# EAGLE board Sprite Sail 2 Layer (EAGLE 9.0.0)
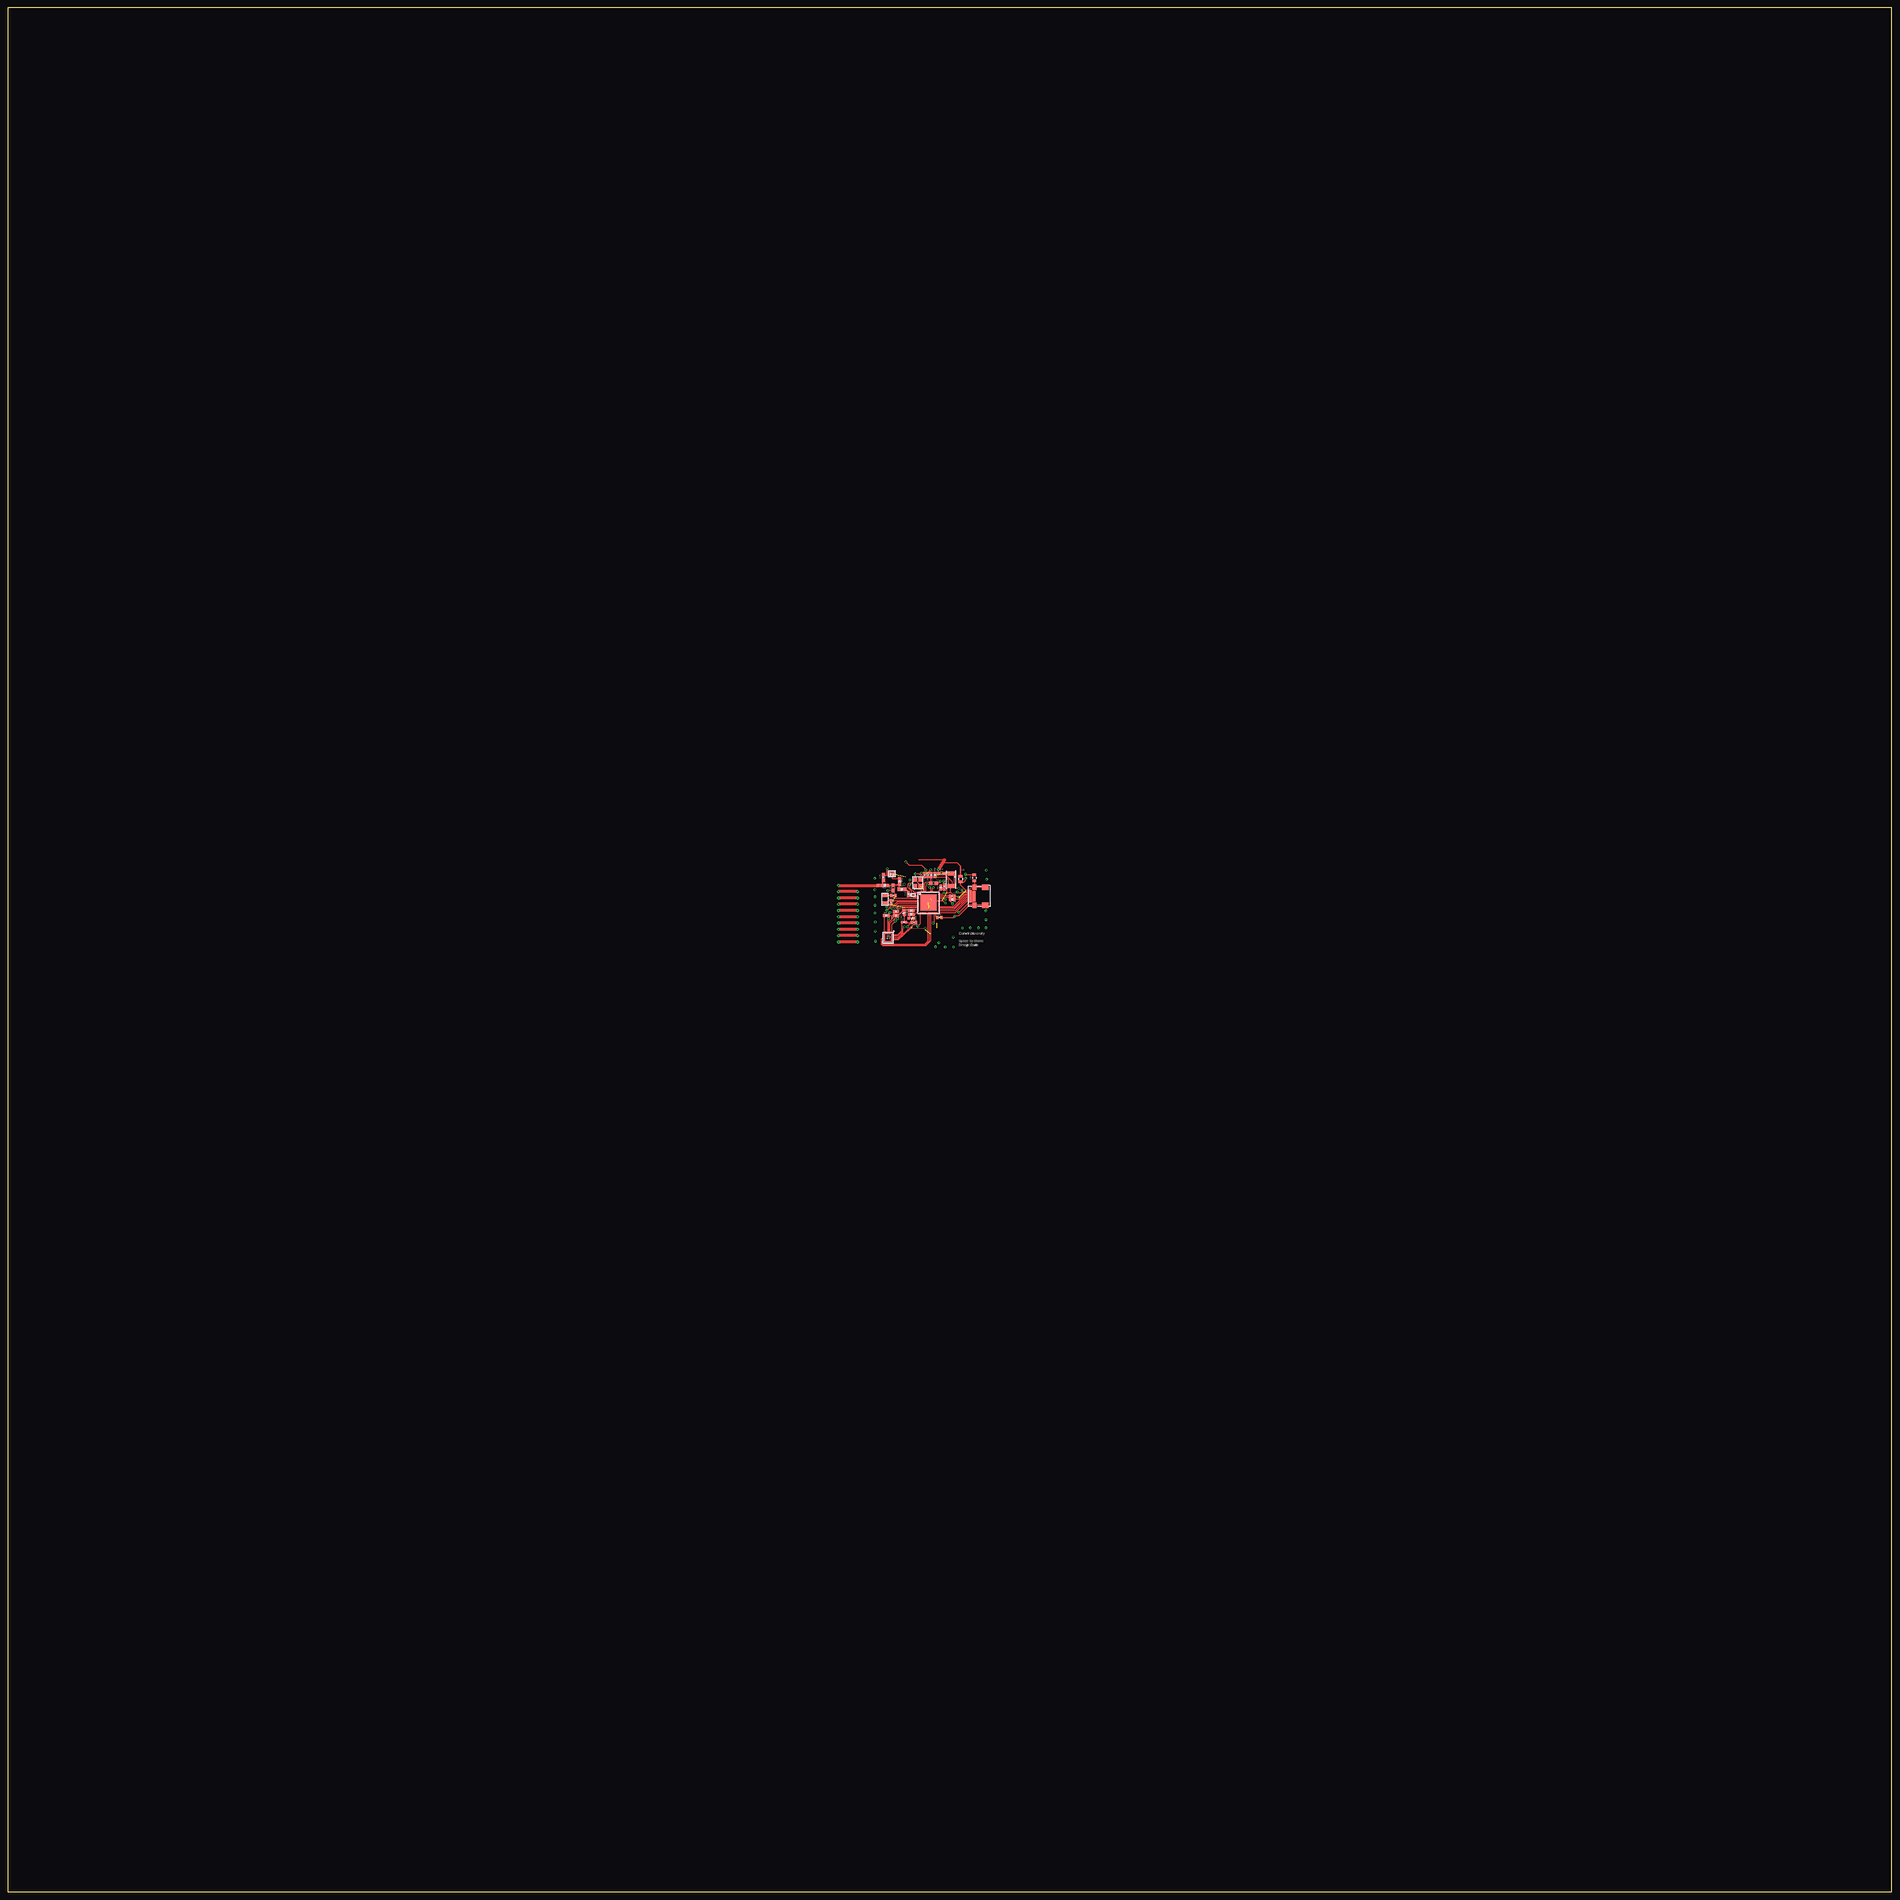
[diagram p0: board, top side]
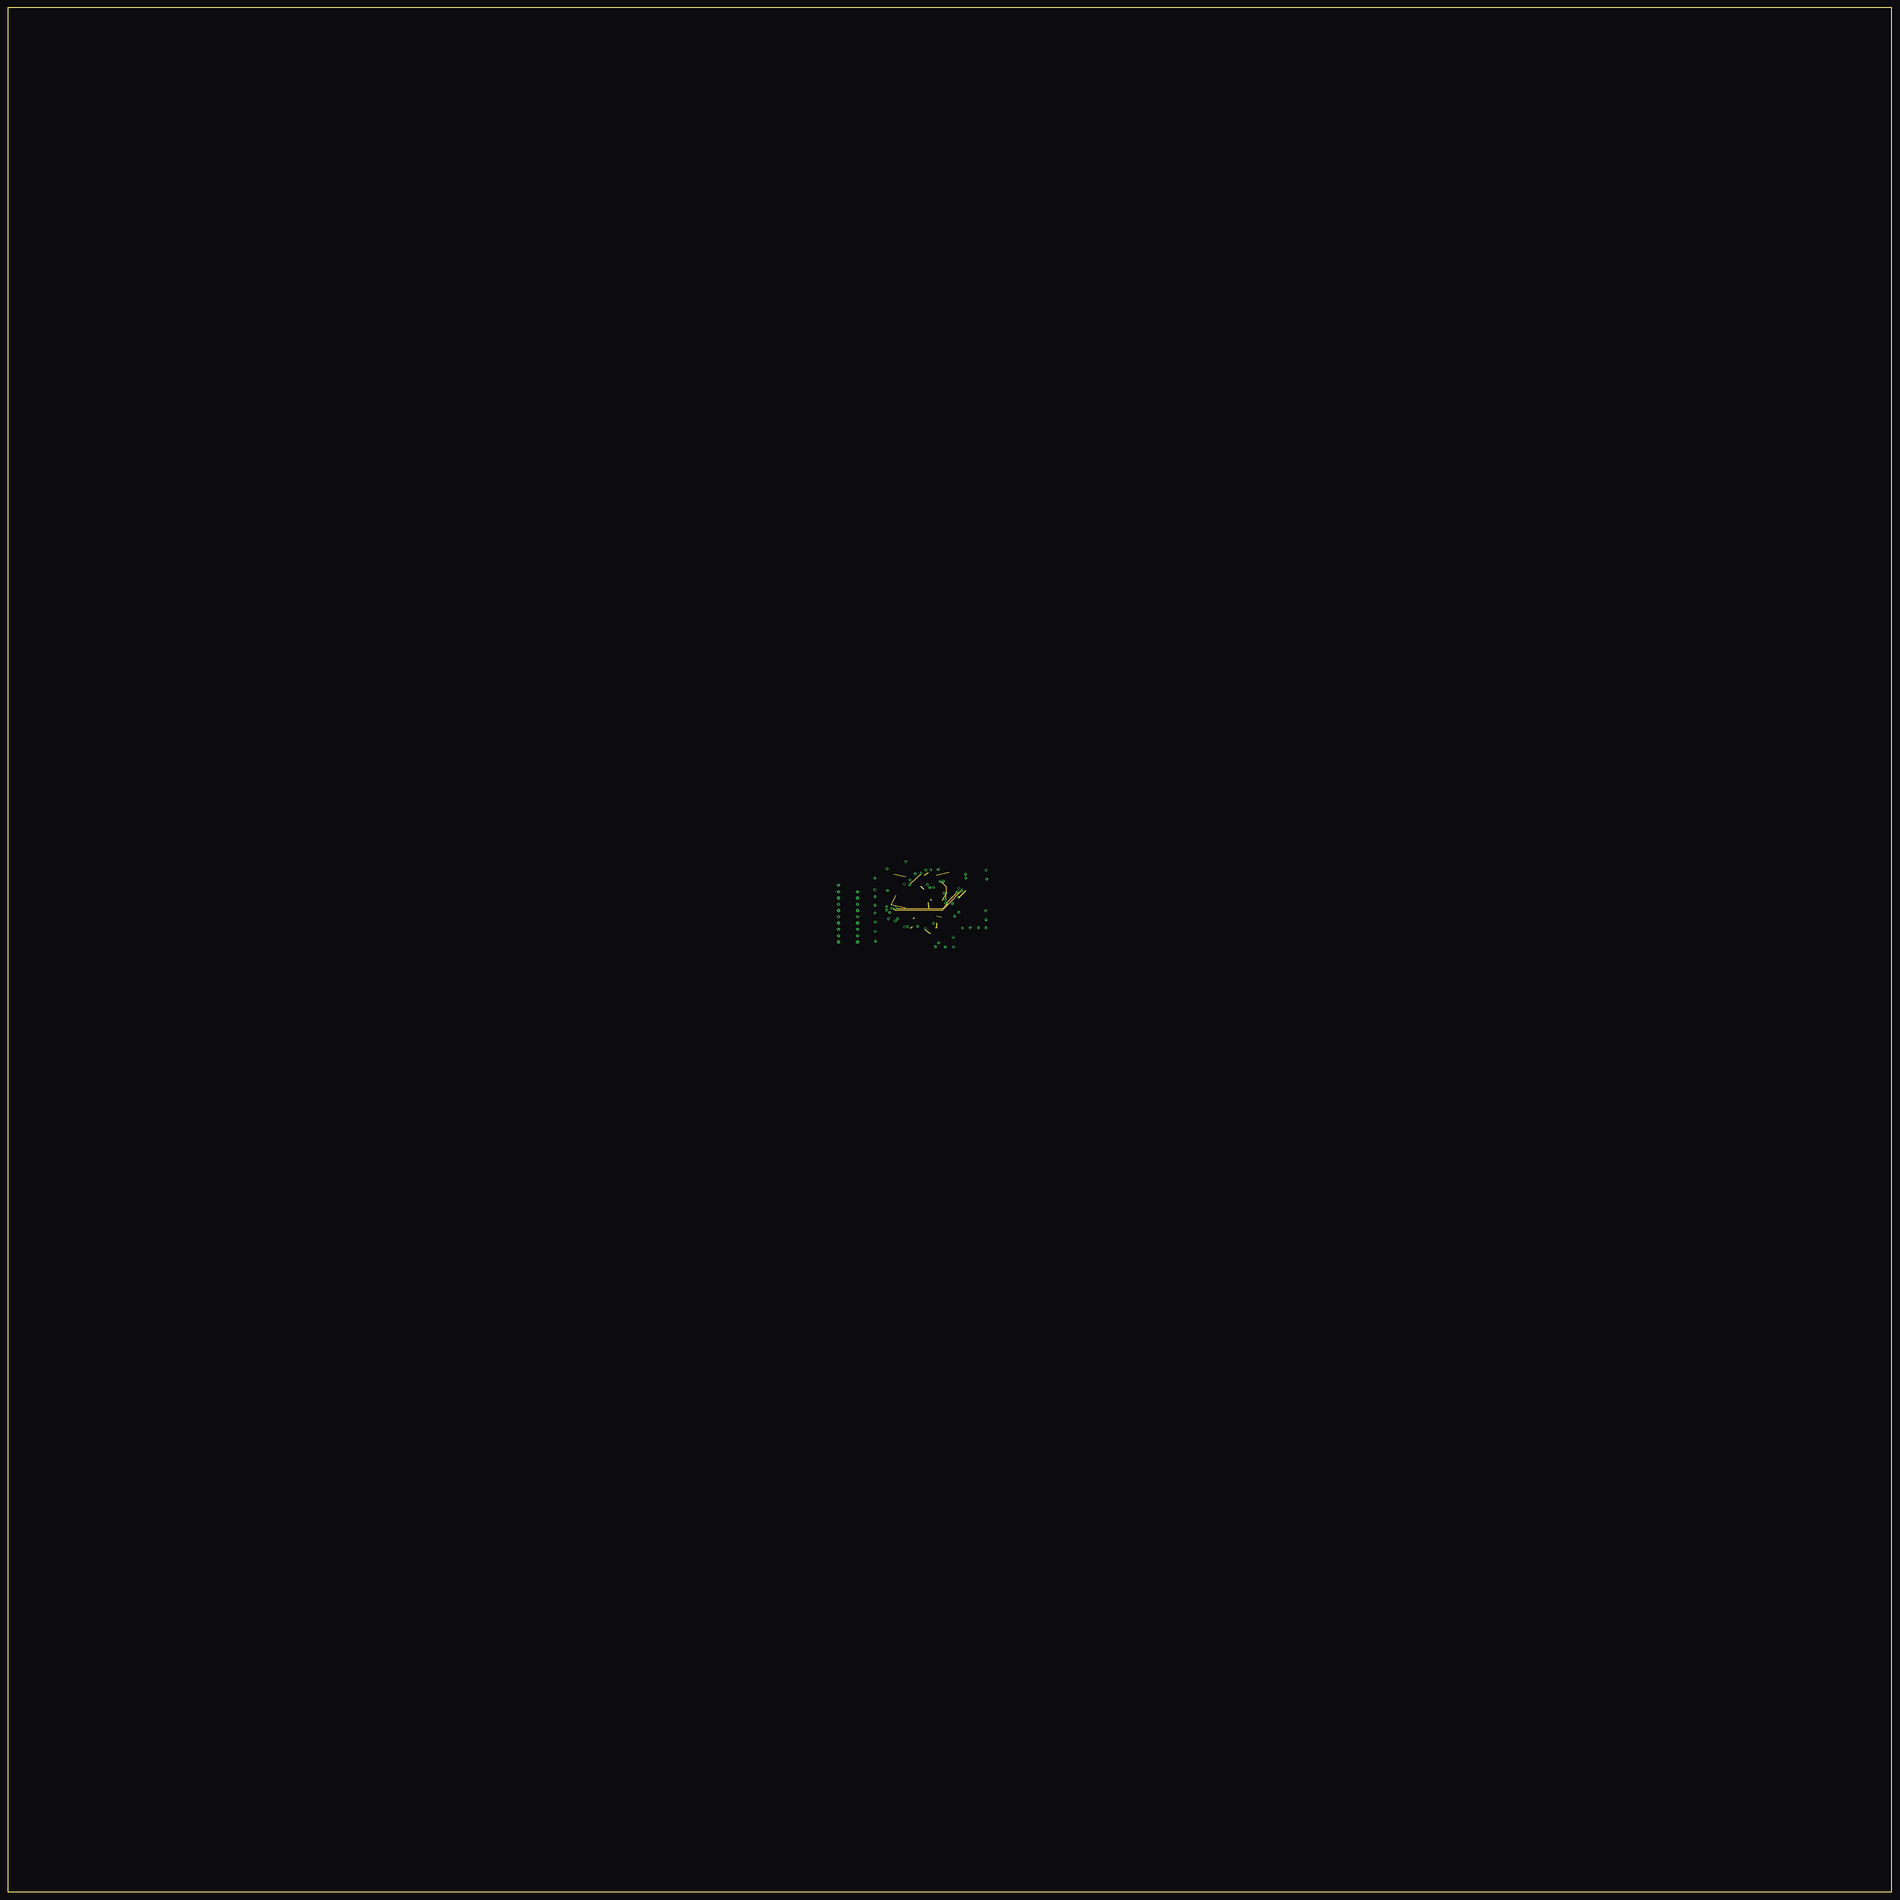
[diagram p1: board, inner layer Route2]
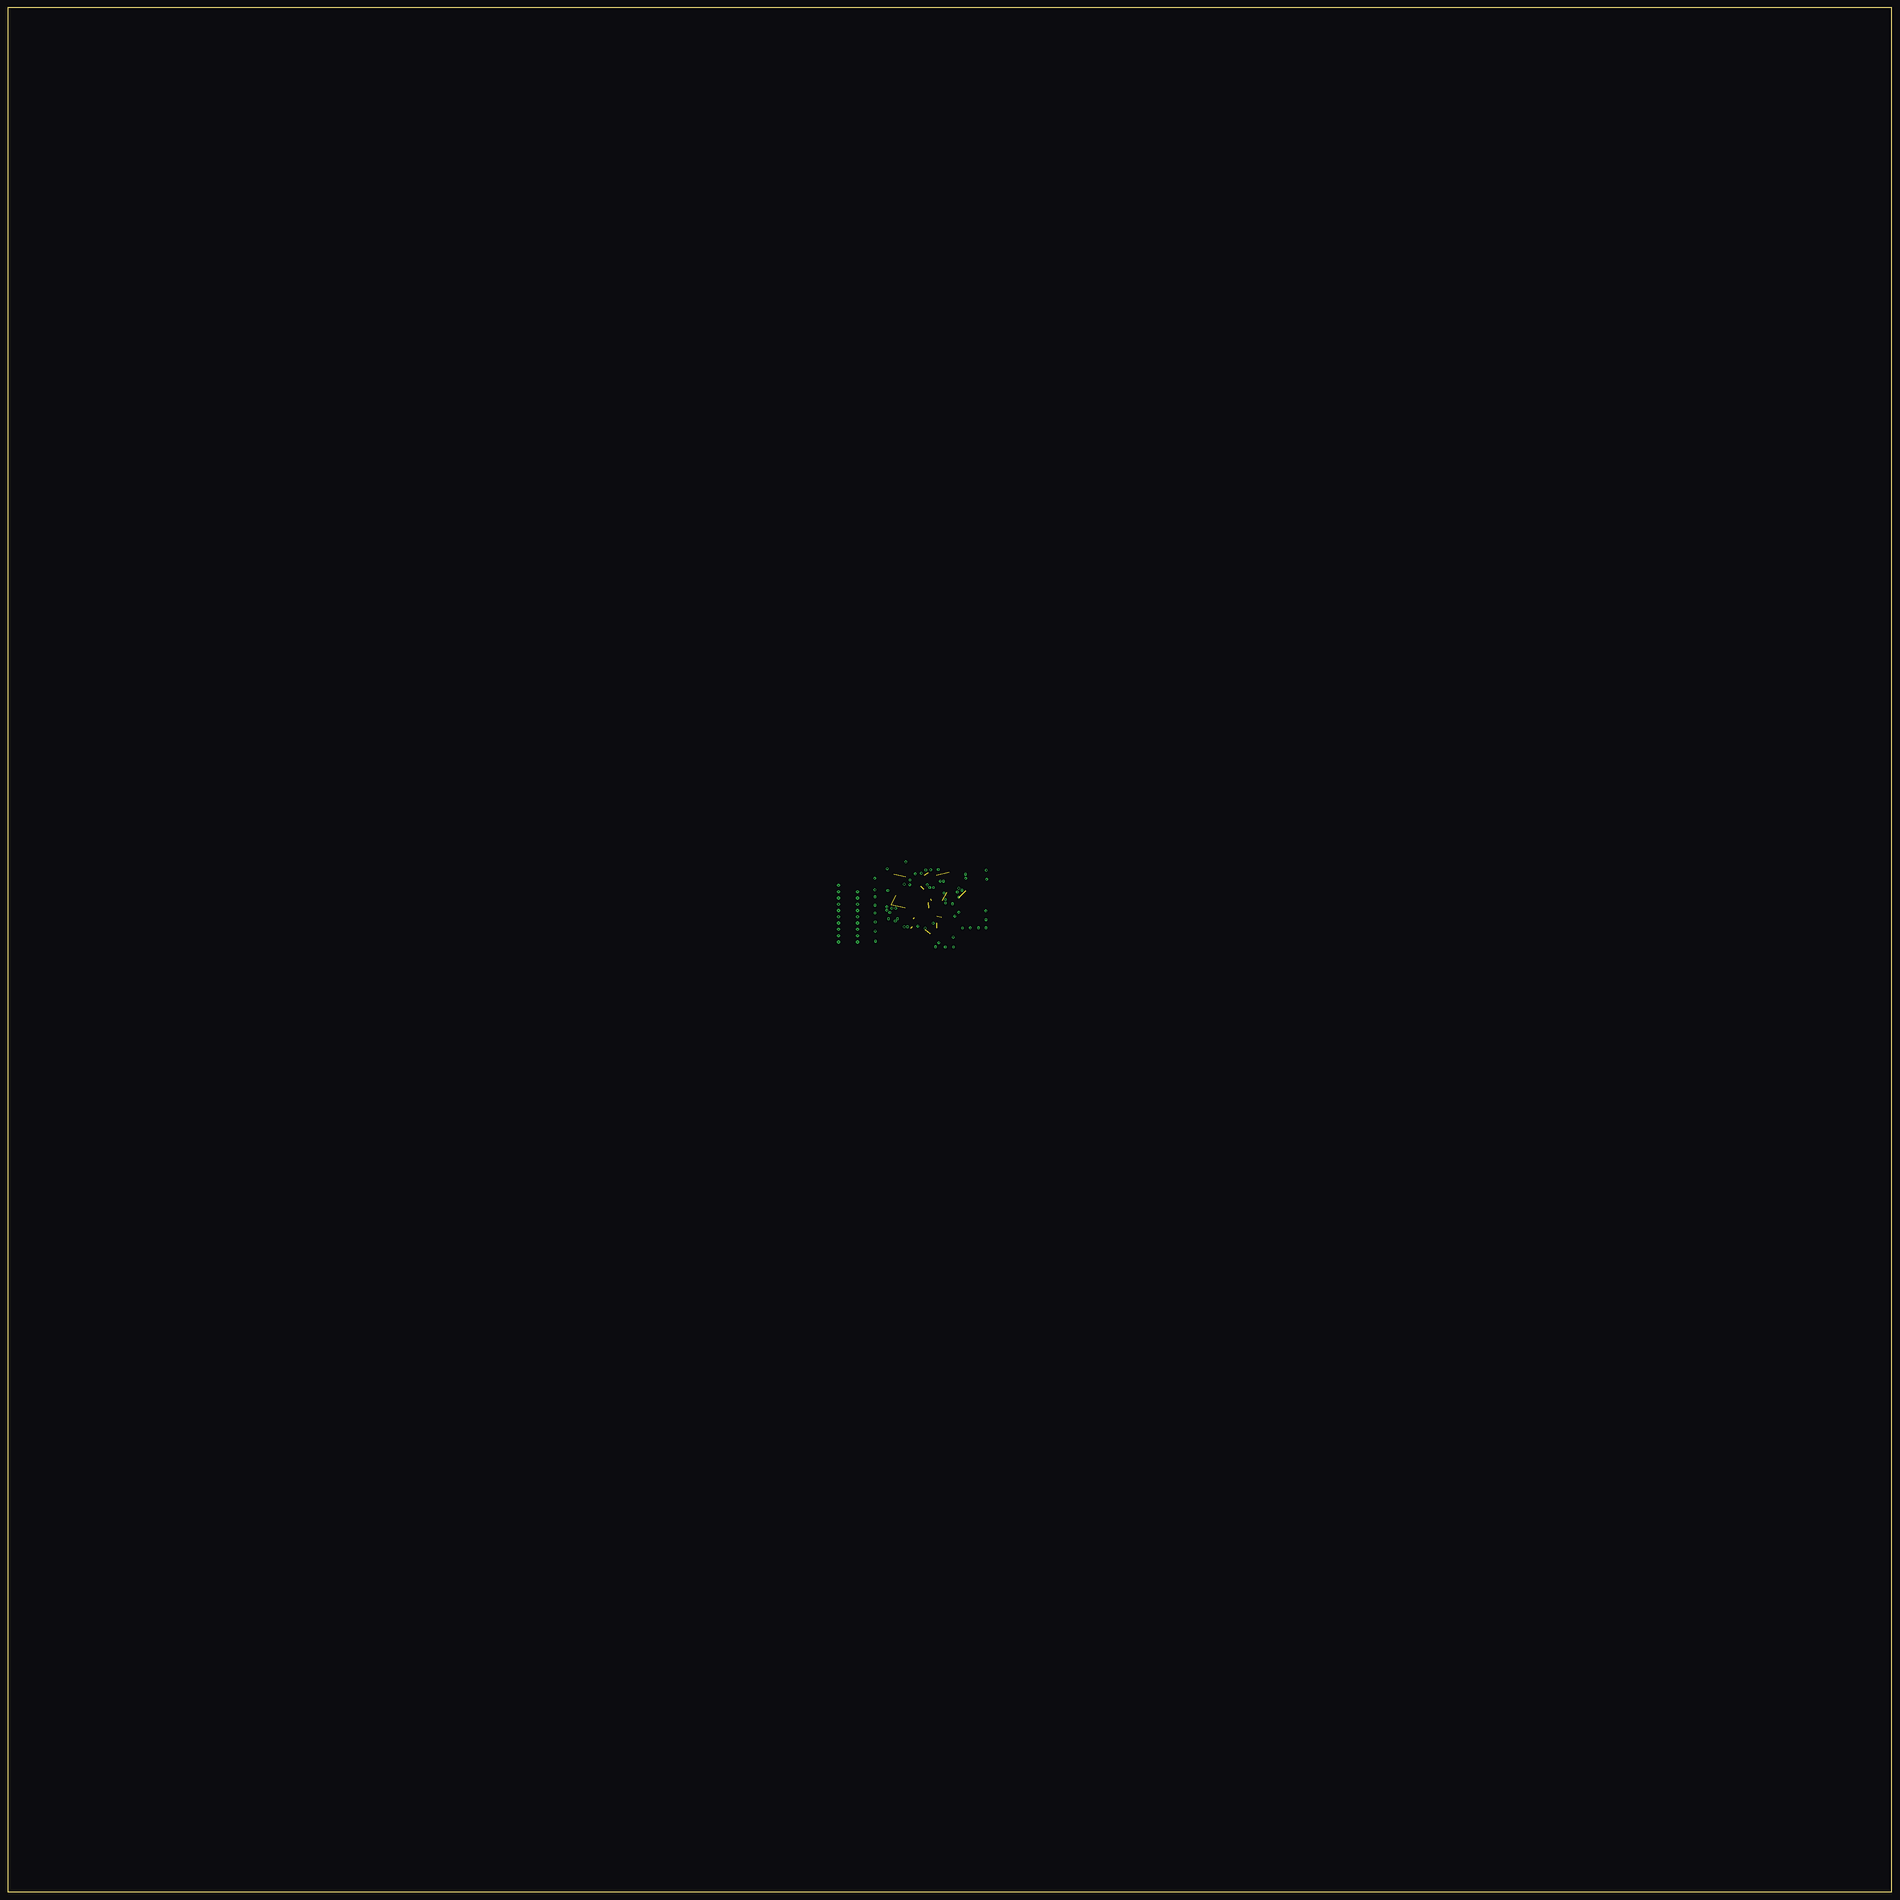
[diagram p2: board, inner layer Route15]
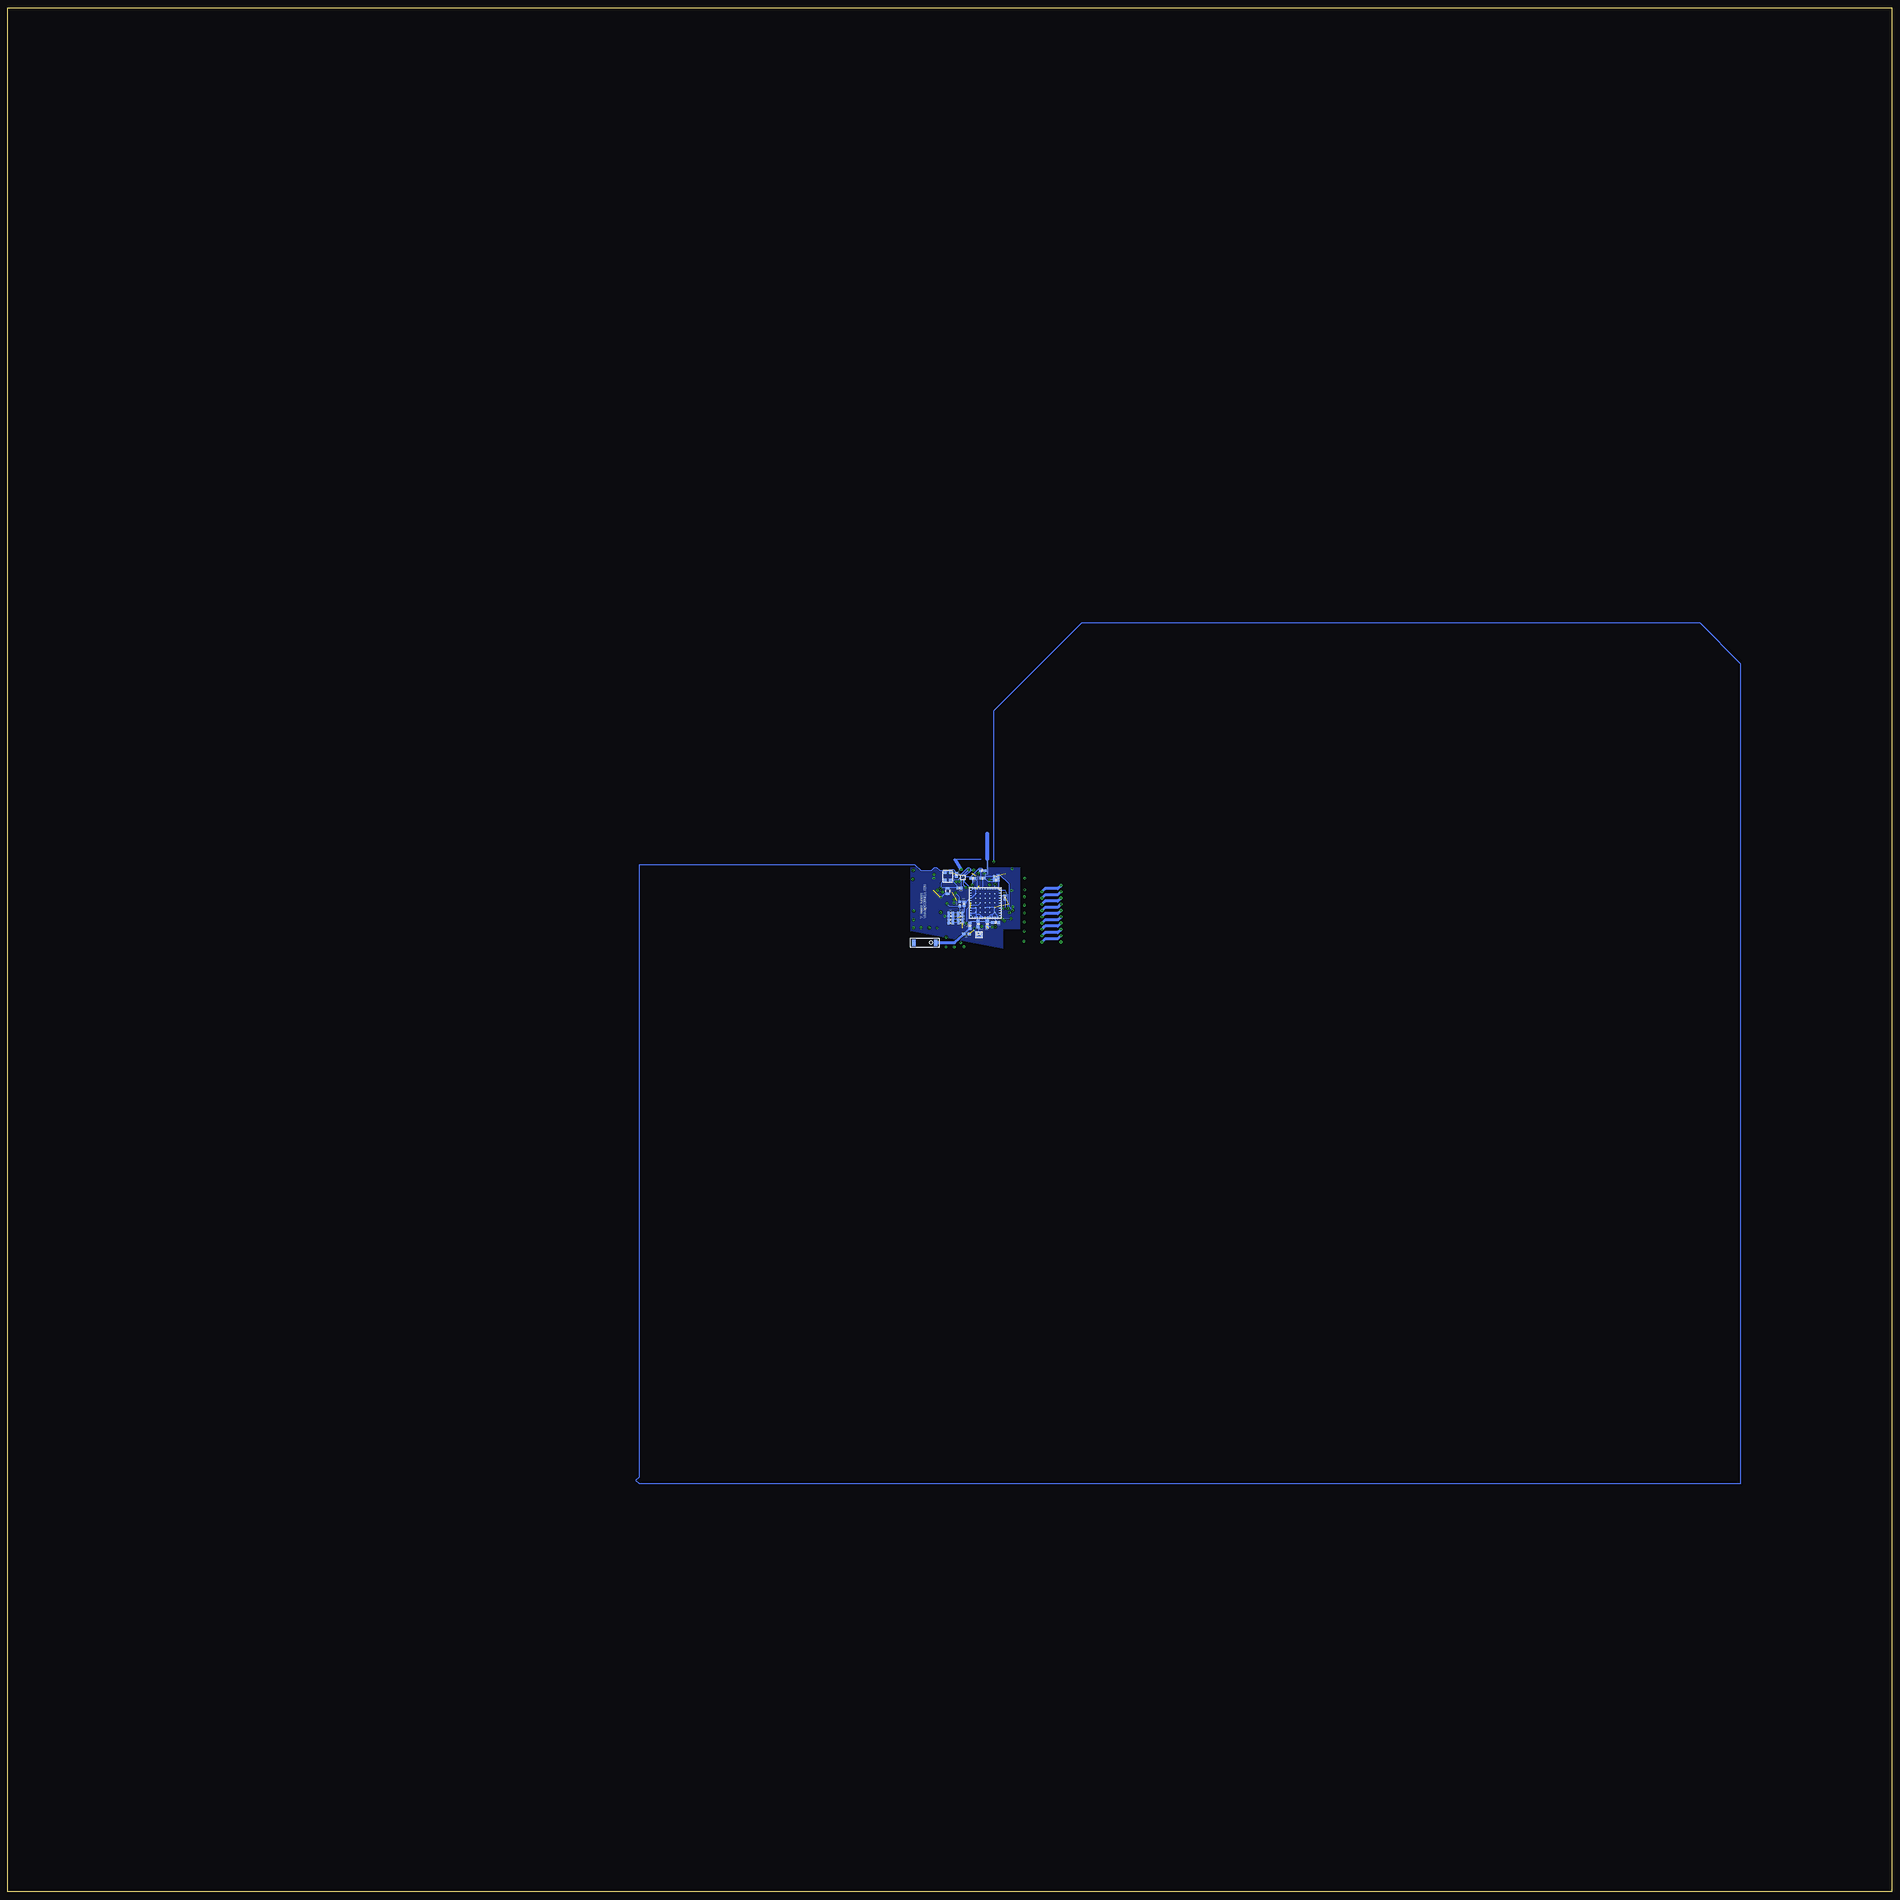
[diagram p3: board, bottom side, seen from below]

Size 600 x 600 mm. Coordinates in mm from the lower left corner, seen from the top.
Outline: 0,0 600,0 600,600 0,600 0,0
Copper layers (1*2*15*16): Top 0.035mm / dielectric 1.5mm / Route2 0.035mm / dielectric 0.15mm / Route15 0.035mm / dielectric 0.2mm / Bottom 0.035mm
Design rules "default *": minimum track width 6mil, minimum drill 0.35mm, track to track 6mil, track to pad 6mil, pad to pad 6mil, via to via 6mil, smd to smd 6mil, copper to edge 40mil, drill to drill 6mil, minimum pad ring 10mil, minimum via ring 8mil, stop-mask expansion 4mil, vias tented up to drill 0mil, thermal gap 10mil

## Footprints (pad centres in the part's own frame; a part is rotated, then mirrored left to right if it is on the bottom)
FC-135 = smd 1 x 1.8: P1 -1.25,0; P2 1.25,0
JOHANSON_BALUN = smd 0.45 x 0.25: 1 -0.4,0.5; 2 -0.4,0; 3 -0.4,-0.5; 4 0.4,-0.5; 5 0.4,0; 6 0.4,0.5
0402-CAP = smd 0.7 x 0.9: 1 -0.65,0; 2 0.65,0
0603-CAP = smd 1.1 x 1: 1 -0.85,0; 2 0.85,0
0805 = smd 0.8 x 1.2: 1 -0.9,0; 2 0.9,0
VENUS838FLPX = smd 0.7 x 0.36: 1 -4.69,4; 2 -4.69,3.2; 3 -4.69,2.4; 4 -4.69,1.6; 5 -4.69,0.8; 6 -4.69,0; 7 -4.69,-0.8; 8 -4.69,-1.6; 9 -4.69,-2.4; 10 -4.69,-3.2; 11 -4.69,-4; 23 4.69,-4; 24 4.69,-3.2; 25 4.69,-2.4; 26 4.69,-1.6; 27 4.69,-0.8; 28 4.69,0; 29 4.69,0.8; 30 4.69,1.6; 31 4.69,2.4; 32 4.69,3.2; 33 4.69,4 | smd 0.36 x 0.7: 12 -4,-4.69; 13 -3.2,-4.69; 14 -2.4,-4.69; 15 -1.6,-4.69; 16 -0.8,-4.69; 17 0,-4.69; 18 0.8,-4.69; 19 1.6,-4.69; 20 2.4,-4.69; 21 3.2,-4.69; 22 4,-4.69; 34 4,4.69; 35 3.2,4.69; 36 2.4,4.69; 37 1.6,4.69; 38 0.8,4.69; 39 0,4.69; 40 -0.8,4.69; 41 -1.6,4.69; 42 -2.4,4.69; 43 -3.2,4.69; 44 -4,4.69 | smd 0.6 x 0.6: 45 -3,3; 46 -3,1.5; 47 -3,0; 48 -3,-1.5; 49 -3,-3; 50 -1.5,3; 51 -1.5,1.5; 52 -1.5,0; 53 -1.5,-1.5; 54 -1.5,-3; 55 0,3; 56 0,1.5; 57 0,0; 58 0,-1.5; 59 0,-3; 60 1.5,3; 61 1.5,1.5; 62 1.5,0; 63 1.5,-1.5; 64 1.5,-3; 65 3,3; 66 3,1.5; 67 3,0; 68 3,-1.5; 69 3,-3
LGA24-8X4 = smd 0.27 x 0.45: 1 -1.505,1.225; 6 -1.505,-1.225; 7 -1.075,-1.225; 8 -0.645,-1.225; 9 -0.215,-1.225; 10 0.215,-1.225; 11 0.645,-1.225; 12 1.075,-1.225; 13 1.505,-1.225; 18 1.505,1.225; 19 1.075,1.225; 20 0.645,1.225; 21 0.215,1.225; 22 -0.215,1.225; 23 -0.645,1.225; 24 -1.075,1.225 | smd 0.45 x 0.27: 2 -1.475,0.645; 3 -1.475,0.215; 4 -1.475,-0.215; 5 -1.475,-0.645; 14 1.475,-0.645; 15 1.475,-0.215; 16 1.475,0.215; 17 1.475,0.645
0603 = smd 1.1 x 1: 1 -0.85,0; 2 0.85,0
LED-0603 = smd 0.8 x 0.8: A 0,-0.75; C 0,0.75
ALS-PT19 = smd 0.8 x 0.8: C -0.75,0; E 0.75,0
CC1310 = smd 0.7 x 0.3: 1 -3.35,2.75; 2 -3.35,2.25; 3 -3.35,1.75; 4 -3.35,1.25; 5 -3.35,0.75; 6 -3.35,0.25; 7 -3.35,-0.25; 8 -3.35,-0.75; 9 -3.35,-1.25; 10 -3.35,-1.75; 11 -3.35,-2.25; 12 -3.35,-2.75; 25 3.35,-2.75; 26 3.35,-2.25; 27 3.35,-1.75; 28 3.35,-1.25; 29 3.35,-0.75; 30 3.35,-0.25; 31 3.35,0.25; 32 3.35,0.75; 33 3.35,1.25; 34 3.35,1.75; 35 3.35,2.25; 36 3.35,2.75 | smd 0.3 x 0.7: 13 -2.75,-3.35; 14 -2.25,-3.35; 15 -1.75,-3.35; 16 -1.25,-3.35; 17 -0.75,-3.35; 18 -0.25,-3.35; 19 0.25,-3.35; 20 0.75,-3.35; 21 1.25,-3.35; 22 1.75,-3.35; 23 2.25,-3.35; 24 2.75,-3.35; 37 2.75,3.35; 38 2.25,3.35; 39 1.75,3.35; 40 1.25,3.35; 41 0.75,3.35; 42 0.25,3.35; 43 -0.25,3.35; 44 -0.75,3.35; 45 -1.25,3.35; 46 -1.75,3.35; 47 -2.25,3.35; 48 -2.75,3.35 | smd 5.15 x 5.15: 49 0,0
0402-RES = smd 0.7 x 0.9: 1 -0.65,0; 2 0.65,0
0603-RES = smd 1.1 x 1: 1 -0.85,0; 2 0.85,0
TSX-3225 = smd 1.4 x 1.15: 1 -1.1,0.8; 2 1.1,0.8; 3 1.1,-0.8; 4 -1.1,-0.8
LV8417CS = smd 0.27 x 0.27: ENA -0.5,-0.5; IN1 0,-0.5; IN2 0.5,-0.5; OUT1 -0.5,0.5; OUT2 0.5,0.5; PGND 0,0.5; SGND 0,0; VCC -0.5,0; VM 0.5,0
MM5829-2700 = smd 0.4 x 1.7: GND1 -0.7,0; GND3 0.7,0 | smd 0.4 x 0.4: GND2 0,0.65 | smd 0.4 x 0.85: SIG 0,-0.425
PANASONIC_RECTIFIER = smd 1 x 1: C1 -0.95,1.2; C2 0.95,-1.2; GND 0.95,1.2; VCC -0.95,-1.2
JOHANSON_GPS_CHIP = smd 1 x 2: NC -3.5,0; SIG 3.5,0
PCB_ANTENNA = drill 0.35 pad 0.756: 1 -8.89,3.11; 2 -6.89,-2.89; 3 -6.89,3.11; 4 -4.89,-2.89; 5 -4.89,3.11; 6 -2.89,-2.89; 7 -2.89,3.11; 8 -0.89,-2.89; 9 -0.89,3.11; 10 1.11,-2.89; 11 1.11,3.11; 12 3.11,-2.89; 13 3.11,3.11; 14 5.11,-2.89; 15 5.11,3.11; 16 7.11,-2.89; 17 7.11,3.11; 18 9.11,-2.89; 19 9.11,3.11 | smd 1 x 1 bottom: ANTENNA -8.89,-9.39
L6920 = smd 0.45 x 1.35: 1 -0.975,-1.975; 2 -0.325,-1.975; 3 0.325,-1.975; 4 0.975,-1.975; 5 0.975,1.975; 6 0.325,1.975; 7 -0.325,1.975; 8 -0.975,1.975
HDMID = smd 0.23 x 0.85: 1 1.8,6.475; 3 1.4,6.475; 5 1,6.475; 7 0.6,6.475; 9 0.2,6.475; 11 -0.2,6.475; 13 -0.6,6.475; 15 -1,6.475; 17 -1.4,6.475; 19 -1.8,6.475 | smd 0.23 x 1: 2 1.6,5.25; 4 1.2,5.25; 6 0.8,5.25; 8 0.4,5.25; 10 0,5.25; 12 -0.4,5.25; 14 -0.8,5.25; 16 -1.2,5.25; 18 -1.6,5.25 | smd 1.8 x 1.38: FOOT1 -2.85,5.06; FOOT2 2.85,5.06 | smd 1.7 x 2: FOOT3 -2.85,1.7; FOOT4 2.85,1.7

## Placement (x,y rotation side)
32.768  FC-135  [FC-135]  279.41,316.05 90 top
BALUN  JOHANSON_BALUN  [JOHANSON_BALUN]  288.37,317.48 90 top
C1  100 nF  [0402-CAP]  300.79,317.14 0 top
C2  100 nF  [0402-CAP]  299.67,311.72 180 bottom
C3  100 nF  [0402-CAP]  299.68,310.64 180 bottom
C4  100 nF  [0402-CAP]  299.69,309.56 180 bottom
C5  100 nF  [0402-CAP]  299.69,308.49 180 bottom
C6  22 uF  [0402-CAP]  296.64,311.73 0 bottom
C7  100 nF  [0402-CAP]  294.13,323.81 90 top
C8  22 uF  [0402-CAP]  293.04,323.8 90 top
C9  100 nF  [0402-CAP]  291.97,323.8 270 top
C10  1 uF  [0402-CAP]  296.68,310.29 0 top
C11  12 pF  [0402-CAP]  282.05,317.32 0 top
C12  12 pF  [0402-CAP]  281.31,315.1 270 top
C13  10 uF  [0402-CAP]  296.63,310.64 0 bottom
C14  0.1 uF  [0402-CAP]  296.62,309.57 0 bottom
C15  0.1 uF  [0402-CAP]  296.61,308.49 0 bottom
C16  10 nF  [0402-CAP]  288.56,308.71 180 top
C17  0.1 uF  [0402-CAP]  285.42,308.74 0 top
C18  0.1 uF  [0402-CAP]  285.19,323.35 180 bottom
C19  100pF  [0603-CAP]  278.85,323.03 270 top
C20  100 uF  [0805]  300.68,318.69 270 bottom
C22  47 uF  [0805]  303.41,322.51 270 top
C23  47 uF  [0805]  307.83,322.94 270 top
C26  100 pF  [0402-CAP]  286.79,317.74 270 top
GPS  VENUS838FLPX  [VENUS838FLPX]  288.72,314.89 270 bottom
IMU  LSM9DS1  [LGA24-8X4]  280.4,303.83 270 top
L1  6.8 uH  [0603]  294.86,321.19 180 top
L2  DNP  [0603]  281.93,319.73 270 top
L3  2.2 nH  [0603]  294.66,304.99 180 bottom
L4  47uH  [0603]  297.3,324.28 180 top
LED1  RED  [LED-0603]  285.48,311.86 180 top
LED2  GREEN  [LED-0603]  287.74,309.99 270 top
LED3  BLUE  [LED-0603]  289.49,325.22 90 bottom
LS1  LIGHTSENSORALS  [ALS-PT19]  296.82,314.54 90 bottom
LS2  LIGHTSENSORALS  [ALS-PT19]  298.32,319.95 270 top
MICROCONTROLLER  CC1310  [CC1310]  293.26,315.01 0 top
R1  100k  [0402-RES]  300.81,316.04 180 top
R2  3.3k  [0402-RES]  282.9,312.21 180 top
R3  3.3k  [0402-RES]  282.89,310.91 180 top
R4  180  [0402-RES]  287.75,312.48 0 top
R5  180  [0402-RES]  287.78,311.27 0 top
R6  10k  [0402-RES]  279.82,310.9 180 top
R7  10k  [0402-RES]  295.47,314.66 270 bottom
R8  10k  [0402-RES]  297.11,319.84 90 top
R9  10k  [0402-RES]  282.4,316.65 270 bottom
R10  180  [0402-RES]  289.6,322.8 180 bottom
R11  1k  [0402-RES]  292.7,322.79 180 bottom
R12  10k  [0402-RES]  285.19,322.22 0 bottom
R13  0  [0603-RES]  279.32,320.51 180 top
R14  0  [0603-RES]  283.98,321.84 270 top
R15  0  [0603-RES]  293.54,307.67 90 bottom
R16  0  [0603-RES]  290.95,308.19 270 bottom
R17  DNP  [0603-RES]  288.08,308.2 270 bottom
R18  10k  [0402-RES]  295.27,323.8 90 top
R19  3.3k  [0402-RES]  296.93,319.64 180 bottom
R20  331  [0402-RES]  297.82,323.84 90 bottom
R21  0  [0603-RES]  284.76,319.28 180 top
R22  0  [0603-RES]  285.39,308.72 0 bottom
TSX3225  TSX-3225  [TSX-3225]  289.85,321.33 90 top
U$2  LV8417CS  [LV8417CS]  295.77,323.11 0 bottom
U$3  MM5329-2700  [MM5829-2700]  281.56,324.16 0 top
U$4  PANASONIC_RECTIFIER  [PANASONIC_RECTIFIER]  300.66,323.46 0 bottom
U$5  JOHANSON_GPS_CHIP  [JOHANSON_GPS_CHIP]  307.98,302.24 0 bottom
U$6  PCB_ANTENNA  [PCB_ANTENNA]  267.71,311.61 270 bottom
U$7  MM5329-2700  [MM5829-2700]  290.72,304.81 180 bottom
U$8  L6920  [L6920]  300.46,322.31 180 top
U$9  HDMID  [HDMID]  312.96,317.05 90 top

## Library data of the parts
32.768 = FC-135
BALUN = JOHANSON_BALUN
C1-C20 C22 C23 C26 L1-L4 LED1-LED3 R1-R22 = SparkFun
GPS = VENUS838FLPX
IMU = SparkFun-Sensors; PROD_ID: IC-12536
LS1 LS2 = SparkFun-Sensors; PROD_ID: IC-11836
MICROCONTROLLER = CC1310RGZ48
TSX3225 = TSX-3225
U$2 = LV8417CS
U$3 U$7 = MM5329-2700
U$4 = Panasonic_Rectifier
U$5 = johanson_gps_chip
U$6 = PCB_ANTENNA
U$8 = L6920
U$9 = HDMID

## Nets
ACCEL_INT: IMU.12 MICROCONTROLLER.18
ADC0: LS1.E MICROCONTROLLER.36 R7.1
ADC1: LS2.E MICROCONTROLLER.37 R8.1
ANTENNA: C19.2 R13.2 U$6.1 U$6.2 U$6.3 U$6.4 U$6.5 U$6.6 U$6.7 U$6.8 U$6.9 U$6.10 U$6.11 U$6.12 U$6.13 U$6.14 U$6.15 U$6.16 U$6.17 U$6.18 U$6.19 U$6.ANTENNA
COIL: R20.2 U$2.OUT2 U$4.C1 U$4.C2
DCDC_SW: L1.1 MICROCONTROLLER.33
GLED: MICROCONTROLLER.12 R5.2
GND: BALUN.5 BALUN.6 C1.2 C2.2 C3.2 C4.2 C5.2 C6.2 C7.2 C8.2 C9.2 C10.2 C11.2 C12.2 C13.2 C14.2 C15.2 C16.2 C17.2 C18.2 C19.1 C20.2 C22.2 C23.2 GPS.10 GPS.11 GPS.15 GPS.19 GPS.21 GPS.22 GPS.24 GPS.25 GPS.27 GPS.28 GPS.29 GPS.31 GPS.33 GPS.49 GPS.60 GPS.61 GPS.62 GPS.64 GPS.65 GPS.69 IMU.14 IMU.15 IMU.16 IMU.17 IMU.18 IMU.19 IMU.20 L2.2 L3.1 LED1.C LED2.C MICROCONTROLLER.32 MICROCONTROLLER.49 R7.2 R8.2 R17.2 TSX3225.2 TSX3225.4 U$2.PGND U$2.SGND U$3.GND1 U$3.GND2 U$3.GND3 U$4.GND U$7.GND1 U$7.GND2 U$7.GND3 U$8.6 U$9.1 U$9.FOOT1 U$9.FOOT2 U$9.FOOT3 U$9.FOOT4
GYRO_INT: IMU.11 MICROCONTROLLER.19
JTAG_TCKC: MICROCONTROLLER.25 U$9.14 U$9.15
JTAG_TMSC: MICROCONTROLLER.24 U$9.16 U$9.17
MAG_INT: IMU.9 MICROCONTROLLER.20
N$1: C10.1 MICROCONTROLLER.23
N$2: 32.768.P2 C11.1 MICROCONTROLLER.4
N$3: 32.768.P1 C12.1 MICROCONTROLLER.5
N$4: LED1.A R4.1
N$5: LED2.A R5.1
N$6: IMU.5 IMU.6 IMU.7 IMU.8 R6.2
N$7: GPS.42 R9.1
N$8: C16.1 IMU.21
N$9: C17.1 IMU.24
N$11: LED3.C R10.2
N$12: GPS.9 R11.1
N$13: C18.1 GPS.1 R12.2
N$14: R15.2 R16.1 R17.1 R22.1
N$15: L3.2 R15.1 U$5.SIG
N$16: R16.2 U$7.SIG
N$19: R19.1 U$2.ENA
N$20: R20.1 U$2.OUT1
N$21: BALUN.1 C26.2
N$22: BALUN.4 MICROCONTROLLER.1
N$23: BALUN.3 MICROCONTROLLER.2
N$24: BALUN.2 MICROCONTROLLER.3
N$25: GPS.32 R22.2
N$26: L2.1 R13.1 R14.2 R21.2
N$27: C26.1 R21.1
N$40: R14.1 U$3.SIG
N$41: R18.1 U$8.5
N$48: L4.1 U$8.7
NAV: GPS.7 MICROCONTROLLER.6 R10.1
PWM1: MICROCONTROLLER.40 U$2.IN1
PWM2: MICROCONTROLLER.41 U$2.IN2
RESET: C1.1 MICROCONTROLLER.35 R1.1 U$9.6 U$9.7
RLED: MICROCONTROLLER.11 R4.2
RXD: GPS.44 MICROCONTROLLER.7 U$9.2 U$9.3
SCL: IMU.2 MICROCONTROLLER.9 R2.1
SDA: IMU.4 MICROCONTROLLER.10 R3.1
SOLAR_CELLS: C22.1 L4.2 R18.2
SWO: MICROCONTROLLER.28 U$9.8 U$9.9
TDI: MICROCONTROLLER.27 U$9.10 U$9.11
TDO: MICROCONTROLLER.26 U$9.12 U$9.13
TXD: MICROCONTROLLER.8 R9.2 U$9.4 U$9.5
VDDR: C7.1 C8.1 C9.1 L1.2 MICROCONTROLLER.45 MICROCONTROLLER.48
VDDS: C2.1 C3.1 C4.1 C5.1 C6.1 C13.1 C14.1 C15.1 C20.1 C23.1 GPS.2 GPS.18 GPS.58 IMU.1 IMU.3 IMU.22 IMU.23 LED3.A LS1.C LS2.C MICROCONTROLLER.13 MICROCONTROLLER.22 MICROCONTROLLER.34 MICROCONTROLLER.44 R1.2 R2.2 R3.2 R6.1 R11.2 R12.1 R19.2 U$2.VCC U$2.VM U$4.VCC U$8.1 U$8.8 U$9.18 U$9.19
X24M_N: MICROCONTROLLER.46 TSX3225.3
X24M_P: MICROCONTROLLER.47 TSX3225.1

## Tracks (layer width: path | path; a pad name or v marks a point on that pad's centre or on a via)
ACCEL_INT
  Top 0.152: MICROCONTROLLER.18 293.01,302.75 292.16,301.9 278.92,301.9 278.72,302.1 278.72,302.56 278.86,302.69 279.11,302.69 IMU.12
ADC0  (via drill 0.35)
  Top 0.152: MICROCONTROLLER.36 297.85,317.76 v298.17,318.08
  Bottom 0.152: 297.91,317.82 v298.17,318.08 296.82,316.73 LS1.E 295.49,315.29 arc-90 R7.1
ADC1
  Top 0.152: MICROCONTROLLER.37 296.28,318.36 R8.1 297.12,319.2 LS2.E
ANTENNA
  Top 0.152: 278.5,320.54 278.6,320.56
  Top 0.254: R13.2 278.5,320.54
  Top 0.508: 278.6,320.56 278.6,321.84 C19.2
  Top 1.016: U$6.2 U$6.3 | U$6.4 U$6.5 | U$6.6 U$6.7 | U$6.8 U$6.9 | U$6.10 U$6.11 | U$6.12 U$6.13 | U$6.14 U$6.15 | U$6.16 U$6.17 | U$6.18 U$6.19 | U$6.1 U$6.ANTENNA R13.2 278.45,320.49
  Bottom 1.016: U$6.1 265.63,319.5 269.6,319.5 U$6.2 | U$6.3 265.62,317.48 269.62,317.48 U$6.4 | U$6.5 265.64,315.46 269.66,315.46 270.6,314.52 U$6.6 | U$6.7 265.6,313.5 269.61,313.5 U$6.8 | U$6.9 265.62,311.47 269.64,311.47 270.6,310.51 U$6.10 | U$6.11 265.62,309.48 269.62,309.48 U$6.12 | U$6.12 | U$6.13 265.61,307.49 269.62,307.49 U$6.14 | U$6.15 265.62,305.48 269.63,305.48 U$6.16 | U$6.17 265.64,303.45 269.67,303.45 270.6,302.52 U$6.18
COIL  (via drill 0.35)
  Top 0.152: v286,328 287,327 291,327 292.35,325.65 v292.35,325.4
  Bottom 0.152: 293.3,325.4 293.3,325.23 294.92,323.61 U$2.OUT2 | 293.3,325.4 293.3,325.73 293.66,326.09 294.31,326.09 296.42,323.97 298.16,323.97 298.5,323.63 298.5,323.57 U$4.C2 | 293.3,325.4 v292.35,325.4 | R20.2 298.73,325.39 300.31,325.39 301.03,324.66 U$4.C1 301.95,325 303,325 304,326 305,326 306,325 309,325 311,327 399,327 399,132 400,131 399,130 48,130 48,391 61,404 258,404 286,376 v286,328
DCDC_SW  (via drill 0.35)
  Top 0.152: 296.85,316.26 MICROCONTROLLER.33 298.35,316.26 v298.63,315.98 | L1.1 296.39,321.19 v297.03,321.84
  Route2 0.152: v298.63,315.98 298.63,317.68 298.78,317.83 298.78,320.09 v297.03,321.84
  Bottom 0.152: v297.03,321.84 297.16,321.89 | v298.63,315.98 298.98,315.98
GLED
  Top 0.152: R5.2 288.92,311.27 MICROCONTROLLER.12
GND  (via drill 0.35)  (15 unrouted)
  Top 0.152: MICROCONTROLLER.49 294.01,315.76 | TSX3225.4 TSX3225.2 289.05,322.5 287.88,321.32 286.99,321.32 286.64,320.97 286.64,319.87 287.87,318.64 BALUN.6 BALUN.5 | MICROCONTROLLER.32 297.7,315.76 v298.63,314.9 | IMU.18 281.74,302.44 281.94,302.44 282,302.5 282,302.58 281.94,302.64 281.74,302.64 IMU.19 | IMU.14 279.87,302.47 279.87,302.67 279.93,302.73 280.01,302.73 280.07,302.67 280.07,302.47 IMU.15 280.3,302.47 280.3,302.67 280.36,302.73 280.44,302.73 280.5,302.67 280.5,302.47 IMU.16 280.73,302.47 280.73,302.67 280.79,302.73 280.87,302.73 280.93,302.67 280.93,302.47 IMU.17 281.16,302.47 281.16,302.67 281.22,302.73 281.6,302.73 IMU.19 | IMU.19 281.51,302.87 281.36,302.87 281.3,302.93 281.3,303.01 281.36,303.07 281.51,303.07 IMU.20 281.69,303.25 283.76,303.25 287.62,306.85 v292.2,306.84 | C1.2 302.16,317.14 v302.86,316.68 | v289.05,324.15 290.25,324.15 290.77,323.63 291.8,323.63 C9.2 | C12.2 280.78,314.45 280.4,314.07 280.41,314.08 v280,313.65 | 286.95,308.71 286.95,307.84 v286.54,307.31 | C8.2 v293.91,325.48 | U$3.GND1 280.86,324.81 U$3.GND2 282.26,324.81 U$3.GND3 | R8.2 297.76,319.83 298.81,319.83 299.03,319.61 299.03,318.36 299.16,318.23 300.35,318.23 300.38,318.2 | C10.2 301.19,310.29 v301.62,310.71 v301.63,310.71 302.83,310.71 306.32,314.2 U$9.FOOT1 U$9.FOOT3 | U$9.FOOT2 306.9,319.9 306.49,319.49 U$9.1 305.15,318.85 303.4,320.6 303.4,321.6 C22.2 | U$9.FOOT4 U$9.FOOT2 | C23.2 307.83,319.98 U$9.FOOT2
  Top 0.254: 294.01,315.76 MICROCONTROLLER.32 | 289.05,322.5 v289.05,324.15 | C11.2 L2.2 v280.3,318.88 | LED1.C 285.48,309.33 C17.2 286.1,308.71 286.95,308.71 C16.2 288.49,309.29 LED2.C | C7.2 293.93,324.38 293.86,324.45 C8.2 | U$3.GND1 280.57,323.88 280.09,323.88 | C19.1 280.09,323.88 | 282.26,324.81 | U$8.6 300.13,318.45 300.38,318.2 C1.2 | C22.2 304.57,321.61 305.04,322.01 v305.04,322.71 | 280.09,323.88 v280.09,325.82
  Route2 0.152: v302.86,316.68 302.99,316.63 | v280,313.65 279.75,313.44 | v280.3,318.88 280.07,318.91 | 295.9,306.99 295.54,306.98 | v301.62,310.71 301.62,310.41 | v286.54,307.31 286.57,307.14 | v292.2,306.84 292.26,306.86 | v293.91,325.48 294.04,325.61 | v280.09,325.82 279.78,326.13
  Route2 0.254: v305.04,322.71 305.11,322.87
  Bottom 0.152: 289.3,324.15 v289.05,324.15 288.25,323.35 C18.2 | v298.63,314.9 298.88,314.88 | GPS.22 GPS.21 291.92,311.69 GPS.69 | GPS.69 GPS.64 291.82,313.29 GPS.19 | GPS.25 GPS.24 291.72,310.4 291.72,311.19 | GPS.69 291.72,311.19 | GPS.31 286.32,311.24 | 286.32,311.24 286.32,311.29 GPS.65 | GPS.33 284.72,310.89 GPS.65 | GPS.11 GPS.10 291.72,319.38 GPS.49 293.12,316.49 GPS.15 293.8,316.1 293.86,316.1 294.79,315.16 294.79,314.87 295.47,314.19 R7.2 | GPS.65 GPS.60 GPS.61 GPS.62 | R17.2 286.57,307.35 v286.54,307.31 | C20.2 301.75,317.79 v302.86,316.68 | U$2.SGND U$2.PGND 295.77,323.62 295.42,323.97 v293.91,325.48 | 291.72,311.19 290.46,311.19 289.91,310.64 289.91,310.59 GPS.27 GPS.28 GPS.29 287.53,310.59 287.53,310.64 286.93,311.24 286.32,311.24 | U$7.GND3 291.42,304.16 U$7.GND2 290.02,304.16 U$7.GND1
  Bottom 0.254: v292.2,306.84 292.2,306.21 291.42,305.43 U$7.GND3 | C2.2 C3.2 | C3.2 C4.2 C5.2 | C6.2 295.99,311.51 | 295.99,311.51 C13.2 C14.2 295.97,308.49 C15.2 | v301.62,310.71 300.33,310.71 C3.2 | R7.2 295.47,312.03 295.99,311.51
  pour Bottom: 277.8,326.13 277.8,308.61 277.76,306.61 283.21,306.58 283.17,300.32 312.42,306 312.4,326.18 277.78,326.18 277.78,326.13
GYRO_INT
  Top 0.152: MICROCONTROLLER.19 293.51,302.82 292.28,301.6 278.79,301.6 278.42,301.97 278.42,302.68 278.85,303.12 279.11,303.12 IMU.11
JTAG_TCKC
  Top 0.152: MICROCONTROLLER.25 301.62,312.27 305.4,316.05 U$9.15 306.99,316.05 307.19,316.25 U$9.14
JTAG_TMSC
  Top 0.152: MICROCONTROLLER.24 301.67,311.66 305.66,315.65 U$9.17 306.99,315.65 307.17,315.83 | 307.17,315.83 | 307.17,315.83 307.19,315.85 U$9.16
MAG_INT
  Top 0.152: MICROCONTROLLER.20 294.01,302.89 292.41,301.29 278.66,301.29 278.11,301.84 278.11,303.24 278.86,303.98 279.11,303.98 IMU.9
N$1
  Top 0.152: MICROCONTROLLER.23 295.51,310.81 C10.1
N$2
  Top 0.152: MICROCONTROLLER.4 282.46,316.26 C11.1 279.43,317.32 32.768.P2
N$3
  Top 0.152: C12.1 MICROCONTROLLER.5 | C12.1 | 32.768.P1 280.37,315.76 C12.1
N$4
  Top 0.152: R4.1 287.1,312.61 LED1.A
N$5
  Top 0.152: R5.1 287.13,310.13 LED2.A
N$6
  Top 0.152: 279.18,305.69 IMU.6 279.06,305.22 278.86,305.22 278.8,305.16 278.8,305.08 | 279.18,305.69 R6.2 | IMU.5 279.64,305.42 279.64,305.57 279.52,305.69 279.18,305.69 | 278.8,305.08 278.86,305.02 279.06,305.02 IMU.7 | IMU.8 279.06,304.59 278.86,304.59 278.8,304.65 278.8,305.08
N$7
  Bottom 0.152: GPS.42 R9.1
N$8
  Top 0.152: IMU.21 283.6,303.62 C16.1
N$9
  Top 0.152: IMU.24 283.52,304.9 284.81,306.19 284.79,308.72 C17.1
N$10  (via drill 0.35)
  other vias: 311.55,306.95
N$11
  Bottom 0.152: LED3.C R10.2
N$12
  Bottom 0.152: GPS.9 291.15,321.89 R11.1
N$13
  Bottom 0.152: C18.1 R12.2 284.54,319.76 GPS.1
N$14
  Bottom 0.152: 287.75,308.72 R17.1 | R16.1
  Bottom 0.508: R22.1 287.75,308.72 | R17.1 R16.1 | R16.1 293.03,309.04 R15.2
N$15
  Bottom 0.152: R15.1 293.68,306.82
  Bottom 0.508: 293.68,306.82 L3.2
  Bottom 1.016: U$5.SIG 298.46,302.24 L3.2
N$16
  Bottom 0.152: U$7.SIG 290.72,307.15 R16.2
N$17  (via drill 0.35)
  other vias: 309.17,306.96
N$18  (via drill 0.35)
  other vias: 306.55,306.95
N$19
  Bottom 0.152: R19.1 U$2.ENA
N$20
  Bottom 0.152: U$2.OUT1 297.4,323.61 R20.1
N$21
  Top 0.152: BALUN.1
  Top 0.254: BALUN.1 C26.2
N$22
  Top 0.152: MICROCONTROLLER.1 289.79,317.88 BALUN.4
N$23
  Top 0.152: MICROCONTROLLER.2 289.79,317.14 289.55,317.14 289.5,317.08 BALUN.3
N$24
  Top 0.152: MICROCONTROLLER.3 289.22,316.76 289.09,316.63 288.65,316.63 288.37,316.91 BALUN.2
N$25
  Bottom 0.254: GPS.32 285.52,309.7 R22.2
N$26
  Top 0.152: R14.2 283.91,320.91 283.58,320.58
  Top 0.254: L2.1 281.96,320.58 | 281.96,320.58 282.33,320.58 | R13.1 281.88,320.5 281.96,320.58
  Top 0.508: R13.1 281.56,320.5 | R21.2 283.91,320.91 | L2.1 283.58,320.58
N$27
  Top 0.254: R21.1 285.9,319.28
  Top 0.508: 285.9,319.28 C26.1
N$28  (via drill 0.35)
  other vias: 304.04,306.91
N$29  (via drill 0.35)
  other vias: 301.13,304.01
N$30  (via drill 0.35)
  other vias: 301.19,300.88
N$31  (via drill 0.35)
  other vias: 298.6,300.86
N$32  (via drill 0.35)
  other vias: 296.53,302.26
N$33  (via drill 0.35)
  other vias: 276.14,319.11
N$34  (via drill 0.35)
  other vias: 276.19,316.82
N$35  (via drill 0.35)
  other vias: 276.19,314.21
N$36  (via drill 0.35)
  other vias: 276.19,311.7
N$37  (via drill 0.35)
  other vias: 276.27,308.84
N$38  (via drill 0.35)
  other vias: 311.53,309.58
N$39  (via drill 0.35)
  other vias: 276.08,322.72
N$40
  Top 0.152: U$3.SIG 281.56,322.9 281.77,322.69 R14.1
N$41
  Top 0.254: R18.1 298.71,323.15 299.48,322.38 U$8.5
N$42  (via drill 0.35)
  other vias: 276.29,305.94
N$43  (via drill 0.35)
  other vias: 276.34,302.76
N$44  (via drill 0.35)
  other vias: 311.5,312.36
N$45  (via drill 0.35)
  other vias: 311.67,325.31
N$46  (via drill 0.35)
  other vias: 311.76,322.42
N$47  (via drill 0.35)
  other vias: 295.47,300.91
N$48
  Top 0.254: L4.1 300.78,321.65 U$8.7
NAV  (via drill 0.35)
  Top 0.152: v279.99,312.56 281.22,313.87 281.86,313.87 283.24,315.26 MICROCONTROLLER.6
  Bottom 0.152: GPS.7 289.55,322.2 R10.1 287.67,321.52 285.12,321.52 285.12,321.68 285.12,323.89 284.99,324.03 284.1,324.03 280.97,320.91 280.97,313.73 v279.99,312.56
PWM1  (via drill 0.35)
  Top 0.152: MICROCONTROLLER.40 294.51,319.45 v294.84,319.82
  Bottom 0.152: U$2.IN1 295.77,320.71 v294.84,319.82
PWM2  (via drill 0.35)
  Top 0.152: MICROCONTROLLER.41 294.02,319.44 v293.6,319.84
  Bottom 0.152: v293.6,319.84 295.27,321.51 U$2.IN2
RESET
  Top 0.152: MICROCONTROLLER.35 300.02,317.26 C1.1 300.32,317.14 301,316.46 301.05,316.46 R1.1 302.93,316.05 304.53,317.65 U$9.7 306.98,317.65 307.15,317.82 | 307.15,317.82 | 307.15,317.82 307.18,317.85 U$9.6
RLED
  Top 0.152: R4.2 288.4,312.76 MICROCONTROLLER.11
RXD  (via drill 0.35)
  Top 0.152: MICROCONTROLLER.7 283.3,314.76 281.78,313.24 v281.58,313.2 | U$9.2 307.19,318.65 306.99,318.45 U$9.3 304.41,318.45 v303.89,318.96
  Route2 0.152: v303.89,318.96 299.54,314.61 299.54,314.53 297.62,312.6 282.5,312.6 281.9,313.2 v281.58,313.2
  Bottom 0.152: GPS.44 283.38,318.88 282.21,318.88 281.55,317.57 v281.58,313.2
S$2
  Bottom 0.152: 288.08,326.08 arc-90 288,326 288,324 289,324
  Bottom 0.406: 288,326 288,329
  Bottom 1.27: 288,329 288,337
SCL
  Top 0.152: MICROCONTROLLER.9 283.73,313.76 283.55,313.58 R2.1 282.82,311.48 282.82,310.28 281.05,308.5 IMU.2
SDA  (via drill 0.35)
  Top 0.152: MICROCONTROLLER.10 285.01,313.26 284.85,313.11 284.85,312.22 R3.1 283.54,310.14 v283.35,309.86 | v280.52,309.88 280.19,309.54 IMU.4
  Bottom 0.152: 283.38,309.83 v283.35,309.86 282.68,309.87 v280.52,309.88
SOLAR_CELLS  (via drill 0.35)
  Top 0.152: 290.05,328.66 298.4,328.66 | v296.41,325.55 v296.4,325.56
  Top 0.254: 303.4,326.74 302.46,327.68 297.98,327.68 | 297.98,327.68 297.42,327.68 298.4,328.66 | 298.04,327.62 297.98,327.68 | R18.2 296.41,324.45 v296.41,325.55 | L4.2 296.4,324.62 v296.4,325.56
  Top 0.406: C22.1 303.4,326.74
  Top 1.016: 298.4,328.66 v296.4,325.56
  Bottom 0.152: v296.4,325.56 296.24,325.5 | 290.03,328.67 298.4,328.67
  Bottom 1.016: 298.4,328.67 v296.4,325.56
SWO
  Top 0.152: MICROCONTROLLER.28 301.19,313.76 304.68,317.25 U$9.9 306.98,317.25 307.18,317.45 U$9.8
TDI
  Top 0.152: MICROCONTROLLER.27 301.3,313.25 304.9,316.85 U$9.11 306.98,316.85 307.18,317.05 U$9.10
TDO
  Top 0.152: MICROCONTROLLER.26 301.43,312.76 305.12,316.45 U$9.13 306.97,316.45 307.17,316.65 U$9.12
TXD  (via drill 0.35)
  Top 0.152: MICROCONTROLLER.8 283.8,314.26 v282.75,313.21 | U$9.4 307.19,318.25 306.99,318.05 U$9.5 302.75,318.05 v302.43,318.37
  Route2 0.152: v302.43,318.37 299.24,315.18 299.24,314.65 297.8,313.21 v282.75,313.21
  Bottom 0.152: 282.32,316 R9.2 282.43,313.53 v282.75,313.21
VDDR  (via drill 0.35)
  Top 0.152: MICROCONTROLLER.45 292,321.07 292.45,321.5 293.74,321.51 L1.2 | MICROCONTROLLER.48 288.58,318.36 287.24,319.7 v287.24,320.72 | v290.94,324.35 292.04,324.35 292.08,324.31 292.14,324.24 arc90 C9.1 C8.1 293.86,323.15 293.93,323.08 C7.1 294.01,323.03 L1.2 | 293.91,321.29 L1.2
  Route2 0.152: v290.94,324.35 v287.24,320.72
VDDS  (via drill 0.35)
  Top 0.152: MICROCONTROLLER.44 292.51,320.36 v292.83,320.67 | MICROCONTROLLER.13 290.51,308.2 v289.87,307.52 | IMU.3 280.63,308.89 281.7,309.94 281.69,310.67 280.62,310.68 280.62,310.75 R6.1 280.47,311.44 v280.91,311.88 | MICROCONTROLLER.34 299.39,316.76 299.69,316.46 299.75,316.46 R1.2 300.16,315.32 v300.88,314.6 | v285.5,307.31 285.12,306.93 285.12,306.06 | IMU.23 283.53,304.48 284.94,305.89 285.03,305.98 285.12,306.06 | IMU.22 283.62,304.05 285.12,305.55 285.12,306.06 | IMU.1 281.62,308.12 v282.65,309.16 | MICROCONTROLLER.22 295,308.63 v294.69,308.43 | LS2.C v298.01,321.83 | U$9.18 307.19,315.45 306.99,315.25 U$9.19 306.21,315.25 v302.88,311.92 | C23.1 305.26,323.84 v305.02,324.08
  Top 0.254: R2.2 R3.2 R6.1 | U$8.1 U$8.8 arc-90 301.68,319.59 v302.85,319.59
  Route15 0.152: v292.83,320.67 293.11,320.63 | v300.88,314.6 301.22,314.6 | v282.65,309.16 282.58,309.08 | v280.91,311.88 281.21,311.88 | v294.69,308.43 294.69,308.13 | v285.5,307.31 285.61,307.25 | v289.87,307.52 289.86,307.28 | v302.85,319.59 302.95,319.71 | v285.52,320.85 285.64,320.97 | v287.36,322.22 287.36,322.36 | v298.01,321.83 298.06,321.81 | v302.88,311.92 302.88,311.78
  Route15 0.254: v305.02,324.08 304.98,324.37
  Bottom 0.152: GPS.58 291.02,314.09 GPS.18 293.8,313.7 293.86,313.7 294.69,312.86 v294.69,308.43 | R11.2 292.83,322.27 v292.83,320.67 | R11.2 293.67,323.11 U$2.VM | U$2.VCC 296.41,322.97 296.75,322.97 297.29,322.43 298.44,322.43 298.8,322.08 298.8,321.58 297.58,320.36 R19.2 297.63,319.59 C20.1 301.81,319.59 v302.85,319.59 | LED3.A 289.12,325.22 289.75,325.85 290.74,325.85 293.35,323.23 R11.2 | GPS.2 v285.52,320.85 | R12.1 v287.36,322.22
  Bottom 0.254: v300.88,314.6 300.07,313.79 LS1.C 296.82,312.2 C6.1 | C3.1 C2.1 C6.1 | C3.1 299.03,309.57 C4.1 | C4.1 C5.1 | C5.1 | C14.1 C15.1 C5.1 | C14.1 C13.1 | C6.1 C13.1 | C14.1 299.03,309.57 C4.1 | C13.1 C3.1 | U$4.VCC 302.85,321.12 v302.85,319.59
X24M_N
  Top 0.152: TSX3225.3 291.51,321.57 MICROCONTROLLER.46
X24M_P
  Top 0.152: MICROCONTROLLER.47 291.01,318.95 290.81,319.15 290.13,319.15 TSX3225.1

## Text on the board
tNames: Cornell University / / Space Systems / Design Studio
bNames: V. Hunter Adams / VHA3@CORNELL.EDU